# Altium PCB Amber_Main_Board.PcbDoc (part 3 of 6)
Units mm, origin at the board's own origin, x right, y up, seen from the top; angles counter-clockwise.
Board outline 90 x 23 mm, 4 copper layers (Top Layer, Power, Ground, Bottom Layer), stack 1.142 mm thick; 237 components, 104 nets, 614 pads, 347 vias.
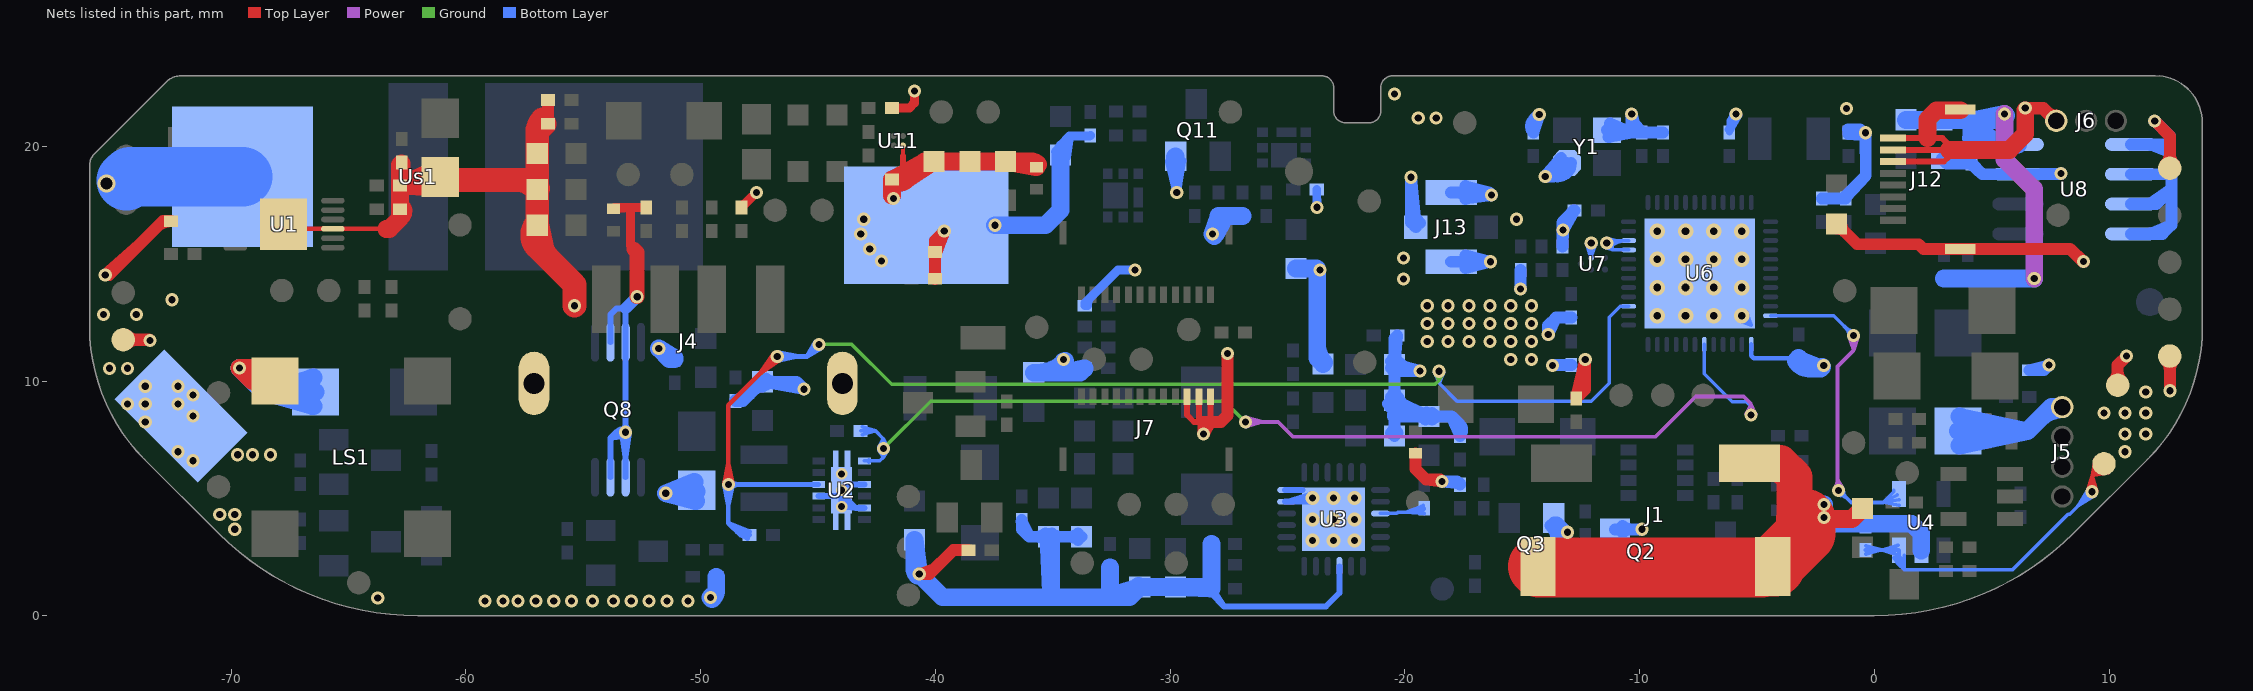
[diagram p5: the nets of this part, all layers, seen from the top]

## Via types
v1: diameter 0.559, hole 0.305, Top Layer to Bottom Layer, tented both sides, 306 vias
v2: diameter 0.66, hole 0.33, Top Layer to Bottom Layer, tented both sides, 16 vias
v3: diameter 0.762, hole 0.508, Top Layer to Bottom Layer, tented both sides, 12 vias
v4: diameter 0.6, hole 0.3, Top Layer to Bottom Layer, tented both sides, 9 vias
v5: diameter 0.5, hole 0.3, Top Layer to Bottom Layer, 3 vias
v6: diameter 0.762, hole 0.559, Top Layer to Bottom Layer, tented both sides, 1 vias

## Nets (pads, with @x,y where several pads share a name; then routed paths per layer and width w, separated by ;. In a path a pad name is that pad's centre, name@x,y a point inside that pad or via, vN(x,y) a via of type N, cw(c..) or ccw(c..) an arc to the next point about the centre after c; other vN are vias at no path point) (continued)
D-: R66.2 U3.3 | length 7.2
  Bottom Layer w0.152: U3.3@-21.041,4.359 -20.361,4.359 ; U3.3@-20.766,4.359 -20.361,4.359 ; -19.878,4.414 ccw(c-19.878,5.231) R66.2@-19.3,4.653 ; -19.51,4.414 ccw(c-19.51,4.863) R66.2@-19.192,4.545 ; R66.2@-19.237,4.693 -19.666,4.441 ; R66.2@-19.222,4.698 -19.955,4.414 ; R66.2@-19.176,4.356 -19.666,4.441 ; R66.2@-19.177,4.58 -19.343,4.414 -20.306,4.414 -20.361,4.359 ; R66.2@-19.17,4.356 -19.955,4.414 ; -19.955,4.414 -19.177,4.53 -19.666,4.441
DC/DC_CTRL: R7.1 U2.4 U6.27 | length 93.5
  Top Layer w0.203: v1@-48.999,5.606 -48.822,6.477 v1@-48.645,5.606 ; v1@-48.995,5.63 -48.837,5.906 ; v1@-48.99,5.645 -48.807,5.906 ; v1@-48.948,5.714 ccw(c-49.251,6.017) -48.822,6.017 ccw(c-48.393,6.017) v1@-48.696,5.714 ; v1@-48.654,5.645 -48.837,5.906 ; v1@-48.649,5.63 -48.807,5.906 ; v1@-46.914,11.049 cw(c-47.343,11.049) -47.04,10.745 cw(c-46.736,10.442) v1@-46.736,10.871 ; v1@-46.872,11.163 -47.446,10.339 ; v1@-46.622,10.913 -47.446,10.339 ; -48.837,5.906 v1(-48.822,5.588) ; v1(-48.822,5.588) -48.807,5.906 ; v1(-48.822,5.588) -48.822,8.963 v1(-46.736,11.049) -47.446,10.339
  Ground w0.152: v1(-44.958,11.557) -43.561,11.557 -41.859,9.855 -18.72,9.855 -18.542,10.033 ; v1@-18.738,10.36 -18.542,10.033 ; v1@-18.655,10.245 cw(c-18.798,10.033) -18.542,10.033 ; v1@-18.429,10.245 ccw(c-18.286,10.033) -18.542,10.033 ; v1@-18.346,10.36 -18.542,10.033 ; -18.542,10.033 v1(-18.542,10.414) -18.542,10.033
  Bottom Layer w0.152: v1@-18.741,10.373 -18.542,9.906 ; v1@-18.74,10.366 -18.559,10.05 ; v1@-18.734,10.348 -18.525,10.05 ; v1@-18.686,10.27 cw(c-19.033,9.923) -18.542,9.923 cw(c-18.051,9.923) v1@-18.398,10.27 ; v1@-18.35,10.348 -18.559,10.05 ; v1@-18.344,10.366 -18.525,10.05 ; v1@-18.343,10.373 -18.542,9.906 ; U6.27@-10.472,13.183 -10.834,13.183 ; -18.559,10.05 v1(-18.542,10.414) ; -18.542,9.906 v1(-18.542,10.414) ; -18.542,9.906 -17.78,9.144 -12.065,9.144 -11.303,9.906 -11.303,12.713 -10.834,13.183 ; v1(-18.542,10.414) -18.525,10.05 ; -10.834,13.183 -10.697,13.183 -10.834,13.183
  Bottom Layer w0.203: v1@-48.999,5.57 -48.822,4.699 v1@-48.645,5.57 ; v1@-48.995,5.546 -48.837,5.27 ; v1@-48.99,5.531 -48.807,5.27 ; v1@-48.948,5.462 cw(c-49.251,5.159) -48.822,5.159 cw(c-48.393,5.159) -48.696,5.462 cw(c-48.372,5.138) -48.372,5.597 ; -48.807,3.935 ccw(c-47.975,4.767) R7.1@-47.975,3.59 ; v1@-48.783,5.761 -48.517,5.61 ; v1@-48.778,5.416 -48.491,5.581 ; v1@-48.771,5.758 -48.491,5.581 ; v1@-48.758,5.422 -48.517,5.61 ; v1@-48.696,5.714 ccw(c-48.414,5.996) -48.414,5.597 ; v1@-48.654,5.531 -48.837,5.27 ; v1@-48.649,5.546 -48.807,5.27 ; -48.46,3.588 ccw(c-47.975,4.073) R7.1@-47.975,3.387 ; R7.1@-48.084,3.341 ccw(c-48.314,3.129) -48.314,3.442 ; R7.1@-48.084,3.542 cw(c-48.314,3.755) -48.314,3.442 ; R7.1@-48.061,3.32 -48.819,3.947 ; R7.1@-48.058,3.319 -48.563,3.748 ; R7.1@-48.022,3.301 -48.318,3.479 ; R7.1@-47.991,3.589 -48.318,3.479 ; R7.1@-47.925,3.442 -48.314,3.442 ; R7.1@-47.922,3.58 -48.563,3.748 ; R7.1@-47.909,3.574 -48.819,3.947 ; v1@-46.718,10.872 -45.847,11.049 v1@-46.718,11.226 ; v1@-46.694,10.876 -46.418,11.034 ; v1@-46.694,11.222 -46.418,11.064 ; v1@-46.679,10.881 -46.418,11.064 ; v1@-46.679,11.217 -46.418,11.034 ; v1@-46.61,10.923 cw(c-46.307,10.62) -46.307,11.049 cw(c-46.307,11.478) v1@-46.61,11.175 ; -45.856,5.597 U2.4@-45.096,5.597 ; v1@-45.136,11.557 cw(c-45.565,11.557) -45.262,11.253 cw(c-44.958,10.95) v1@-44.958,11.379 ; v1@-45.098,11.666 -45.466,11.049 ; U2.4@-44.971,5.597 -48.813,5.597 v1(-48.822,5.588) ; v1@-44.849,11.417 -45.466,11.049 ; -48.837,5.27 v1(-48.822,5.588) ; v1(-48.822,5.588) -48.807,5.27 ; v1(-48.822,5.588) -48.491,5.581 ; v1(-48.822,5.588) -48.517,5.61 ; v1(-48.822,5.588) -48.822,3.95 -48.314,3.442 ; -48.819,3.947 R7.1@-47.975,3.442 ; -48.563,3.748 R7.1@-47.975,3.442 ; -48.318,3.479 R7.1@-47.975,3.442 ; -48.314,3.442 -48.008,3.297 -48.314,3.442 ; -48.314,3.442 -48.008,3.587 -48.314,3.442 ; -48.314,3.442 R7.1@-47.975,3.442 ; -48.314,3.442 R7.1@-47.975,3.442 ; v1(-46.736,11.049) -46.418,11.034 ; v1(-46.736,11.049) -46.418,11.064 ; v1(-46.736,11.049) -45.466,11.049 ; -45.466,11.049 v1(-44.958,11.557) -45.466,11.049
DC/DC_PG: R6.1 U2.7 U6.18 | length 66.4
  Power w0.152: v1@-26.769,8.054 -26.06,8.255 v1@-26.769,8.456 ; v1@-26.749,8.057 -26.433,8.238 ; v1@-26.749,8.453 -26.433,8.272 ; v1@-26.731,8.063 -26.433,8.272 ; v1@-26.731,8.447 -26.433,8.238 ; v1@-26.653,8.111 cw(c-26.306,7.764) -26.306,8.255 cw(c-26.306,8.746) v1@-26.653,8.399 ; v1@-5.46,8.597 -5.261,9.03 ; v1@-5.458,8.603 -5.279,8.902 ; v1@-5.452,8.623 -5.243,8.902 ; v1@-5.402,8.7 ccw(c-5.717,9.03) -5.261,9.03 ; v1@-5.12,8.7 cw(c-4.805,9.03) -5.261,9.03 ; v1@-5.07,8.623 -5.279,8.902 ; v1@-5.064,8.603 -5.243,8.902 ; v1@-5.063,8.597 -5.261,9.03 ; v1(-26.797,8.255) -26.433,8.238 ; v1(-26.797,8.255) -26.433,8.272 ; v1(-26.797,8.255) -25.4,8.255 -24.778,7.633 -9.322,7.633 -7.696,9.259 -7.696,9.262 -7.617,9.341 -5.572,9.341 -5.261,9.03 ; -5.279,8.902 v1(-5.261,8.554) ; v1(-5.261,8.554) -5.243,8.902 ; v1(-5.261,8.554) -5.261,9.03
  Ground w0.152: v1(-42.218,7.125) -40.199,9.144 -27.686,9.144 v1(-26.797,8.255)
  Bottom Layer w0.152: R6.1@-43.188,7.874 -42.545,7.874 ; R6.1@-43.113,7.702 -42.545,7.874 ; R6.1@-43.113,8.046 -42.545,7.874 ; R6.1@-43.097,7.705 -42.827,7.86 ; R6.1@-43.097,8.043 -42.827,7.888 ; R6.1@-43.082,7.71 -42.827,7.888 ; R6.1@-43.082,8.038 -42.827,7.86 ; U2.7@-43.021,6.597 -42.365,6.597 ; R6.1@-43.015,7.751 cw(c-42.718,7.454) -42.718,7.874 cw(c-42.718,8.294) R6.1@-43.015,7.997 ; U2.7@-42.896,6.597 -42.365,6.597 ; U2.7@-42.844,6.545 cw(c-42.718,6.419) -42.718,6.597 cw(c-42.718,6.775) U2.7@-42.844,6.649 ; v1@-42.415,7.174 -42.218,7.547 ; v1@-42.414,7.071 -42.218,6.744 ; v1@-42.414,7.178 -42.241,7.424 ; v1@-42.403,7.208 -42.195,7.424 ; v1@-42.345,7.284 ccw(c-42.555,7.547) -42.218,7.547 ; v1@-42.331,6.956 cw(c-42.474,6.744) -42.218,6.744 ; v1@-42.105,6.956 ccw(c-41.962,6.744) -42.218,6.744 ; v1@-42.091,7.284 cw(c-41.881,7.547) -42.218,7.547 ; v1@-42.033,7.208 -42.241,7.424 ; v1@-42.022,7.071 -42.218,6.744 ; v1@-42.022,7.178 -42.195,7.424 ; v1@-42.021,7.174 -42.218,7.547 ; -7.247,10.776 U6.18@-7.247,11.333 ; U6.18@-7.247,11.558 -7.247,10.309 -6.061,9.123 -5.449,9.123 -5.261,8.935 ; v1@-5.457,8.608 -5.261,8.935 ; v1@-5.374,8.722 ccw(c-5.517,8.935) -5.261,8.935 ; v1(-5.261,8.554) -5.261,8.935 ; v1@-5.148,8.722 cw(c-5.005,8.935) -5.261,8.935 ; v1@-5.065,8.608 -5.261,8.935 ; R6.1@-43.138,7.874 -42.545,7.874 ; R6.1@-43.138,7.874 -42.827,7.86 ; R6.1@-43.138,7.874 -42.827,7.888 ; -42.545,7.874 -42.218,7.547 ; -42.365,6.597 -42.218,6.744 ; -42.241,7.424 v1(-42.218,7.125) ; -42.218,6.744 v1(-42.218,7.125) ; v1(-42.218,7.125) -42.195,7.424 ; v1(-42.218,7.125) -42.218,7.547
DOG_E\N\: R28.1 TP12.1 U4.3 | length 71.7
  Top Layer w0.152: v1@9.07,5.313 9.271,5.969 ; v1@9.073,5.331 9.254,5.647 ; v1@9.079,5.349 9.288,5.647 ; v1@9.127,5.427 ccw(c8.78,5.774) 9.271,5.774 ccw(c9.762,5.774) v1@9.415,5.427 ; TP12.1@9.372,6.36 cw(c8.99,6.25) 9.271,5.969 ; v1@9.463,5.349 9.254,5.647 ; v1@9.469,5.331 9.288,5.647 ; v1@9.472,5.313 9.271,5.969 ; TP12.1@9.662,6.07 ccw(c9.552,5.688) 9.271,5.969 ; 9.254,5.647 v1(9.271,5.283) ; v1(9.271,5.283) 9.288,5.647 ; v1(9.271,5.283) 9.271,5.969 ; 9.271,5.969 TP12.1@9.977,6.102 ; 9.271,5.969 TP12.1@9.404,6.675 ; 9.271,5.969 TP12.1@9.931,6.252 ; 9.271,5.969 TP12.1@9.554,6.629 ; 9.271,5.969 TP12.1@9.856,6.386 ; 9.271,5.969 TP12.1@9.688,6.554 ; 9.271,5.969 TP12.1@9.779,6.477 ; 9.271,5.969 TP12.1@9.977,6.102 ; 9.271,5.969 TP12.1@9.404,6.675 ; 9.271,5.969 TP12.1@9.931,6.252 ; 9.271,5.969 TP12.1@9.554,6.629 ; 9.271,5.969 TP12.1@9.856,6.386 ; 9.271,5.969 TP12.1@9.688,6.554 ; 9.271,5.969 TP12.1@9.779,6.477 ; 9.271,5.969 TP12.1@9.977,6.102 ; 9.271,5.969 TP12.1@9.404,6.675 ; 9.271,5.969 TP12.1@9.931,6.252 ; 9.271,5.969 TP12.1@9.554,6.629 ; 9.271,5.969 TP12.1@9.856,6.386 ; 9.271,5.969 TP12.1@9.688,6.554 ; 9.271,5.969 TP12.1@9.779,6.477 ; 9.271,5.969 TP12.1@9.779,6.477 ; 9.279,5.977 TP12.1@9.975,6.101 ; 9.279,5.977 9.403,6.673 9.279,5.977 ; 9.279,5.977 TP12.1@9.93,6.252 ; 9.279,5.977 TP12.1@9.554,6.629 ; 9.279,5.977 TP12.1@9.856,6.386 ; 9.279,5.977 TP12.1@9.688,6.554 ; 9.279,5.977 TP12.1@9.779,6.477 ; 9.279,5.977 TP12.1@9.975,6.101 ; 9.279,5.977 TP12.1@9.93,6.252 ; 9.279,5.977 TP12.1@9.554,6.629 ; 9.279,5.977 TP12.1@9.856,6.386 ; 9.279,5.977 TP12.1@9.688,6.554 ; 9.279,5.977 TP12.1@9.779,6.477 ; 9.279,5.977 TP12.1@9.975,6.101 ; 9.279,5.977 9.403,6.673 9.279,5.977 ; 9.279,5.977 TP12.1@9.931,6.252 ; 9.279,5.977 TP12.1@9.554,6.628 ; 9.279,5.977 TP12.1@9.856,6.386 ; 9.279,5.977 9.688,6.554 9.279,5.977 ; 9.279,5.977 TP12.1@9.779,6.477 ; 9.279,5.977 TP12.1@9.975,6.101 ; 9.279,5.977 TP12.1@9.931,6.252 ; 9.279,5.977 TP12.1@9.554,6.628 ; 9.279,5.977 TP12.1@9.856,6.386 ; 9.279,5.977 TP12.1@9.779,6.477
  Bottom Layer w0.152: R28.1@-0.36,2.63 0.326,2.802 R28.1@-0.36,2.974 ; R28.1@-0.34,2.633 -0.07,2.788 ; R28.1@-0.34,2.971 -0.07,2.816 ; R28.1@-0.325,2.638 -0.07,2.816 ; R28.1@-0.325,2.966 -0.07,2.788 ; R28.1@-0.258,2.679 cw(c0.039,2.382) 0.039,2.802 cw(c0.039,3.222) R28.1@-0.258,2.925 ; 0.472,2.802 cw(c0.472,2.213) U4.3@0.888,2.629 ; 0.541,2.802 ccw(c0.541,3.293) U4.3@0.888,2.946 ; U4.3@0.855,2.421 1.267,1.958 ; U4.3@0.948,2.337 cw(c0.871,2.179) 1.047,2.179 ; U4.3@0.963,2.58 0.668,2.819 ; U4.3@0.981,2.584 ccw(c1.216,2.418) 1.012,2.214 ; U4.3@0.984,3.003 0.624,2.782 ; U4.3@0.99,2.571 0.624,2.782 ; U4.3@0.998,3.006 0.668,2.819 ; U4.3@1.009,2.567 0.289,2.802 ; U4.3@1.018,3.01 0.289,2.802 ; U4.3@1.105,2.496 ccw(c1.365,2.312) 1.14,2.086 ; U4.3@1.145,2.337 ccw(c1.222,2.179) 1.047,2.179 ; U4.3@1.229,2.408 ccw(c1.515,2.206) 1.267,1.958 ; U4.3@1.267,2.578 1.267,1.958 ; v1@9.068,5.283 cw(c8.577,5.283) 8.924,4.936 cw(c9.271,4.589) v1@9.271,5.08 ; v1@9.111,5.409 8.668,4.68 ; v1@9.397,5.123 8.668,4.68 ; R28.1@-0.381,2.802 -0.07,2.788 ; R28.1@-0.381,2.802 -0.07,2.816 ; R28.1@-0.381,2.802 1.032,2.802 U4.3@1.047,2.788 ; 0.289,2.802 U4.3@1.047,2.788 ; 0.624,2.782 U4.3@1.047,2.788 ; 0.668,2.819 U4.3@1.047,2.788 ; 1.047,2.179 1.259,2.468 1.047,2.179 ; 1.047,2.179 0.834,2.468 1.047,2.179 ; 1.047,2.179 U4.3@1.047,2.538 ; 1.047,2.179 U4.3@1.047,2.538 ; 1.047,2.179 U4.3@1.047,2.788 ; 1.047,2.179 1.267,1.958 ; U4.3@1.047,2.538 1.267,1.958 ; 1.267,1.958 5.881,1.958 8.249,4.326 8.313,4.326 v1(9.271,5.283) 8.668,4.68
DOG_WDI: U4.4 U6.11 | length 25.6
  Power w0.152: v1@-1.725,5.363 -1.586,5.62 ; v1@-1.724,5.368 -1.552,5.775 ; v1@-1.668,5.478 ccw(c-1.892,5.702) -1.575,5.702 ; -1.575,5.947 ccw(c-0.911,5.947) v1@-1.38,5.478 ; v1@-1.353,5.443 -1.586,5.62 ; v1@-1.33,5.393 -1.552,5.775 ; v1@-1.09,11.905 -0.889,11.303 ; v1@-1.087,11.89 -0.906,11.574 ; v1@-1.081,11.872 -0.872,11.574 ; v1@-1.033,11.794 cw(c-1.38,11.447) -0.889,11.447 cw(c-0.398,11.447) v1@-0.745,11.794 ; v1@-0.697,11.872 -0.906,11.574 ; v1@-0.691,11.89 -0.872,11.574 ; v1@-0.688,11.905 -0.889,11.303 ; -1.586,5.62 v1(-1.524,5.334) ; -1.552,5.775 v1(-1.524,5.334) ; v1(-1.524,5.334) -1.575,5.385 -1.575,10.617 -0.889,11.303 ; -0.906,11.574 v1(-0.889,11.938) ; -0.889,11.303 v1(-0.889,11.938) ; -0.889,11.303 v1(-0.889,11.938) ; v1(-0.889,11.938) -0.872,11.574
  Bottom Layer w0.152: U6.11@-4.422,12.783 -1.734,12.783 v1(-0.889,11.938) ; U6.11@-4.197,12.783 -3.64,12.783 ; v1@-1.524,5.131 cw(c-1.524,4.572) -1.129,4.967 ; v1(-1.524,5.334) -1.496,5.334 -0.988,4.826 0.37,4.826 ; v1@-1.321,5.334 ccw(c-0.898,5.334) -1.197,5.035 ; v1@-1.092,11.938 ccw(c-1.583,11.938) -1.236,12.285 ccw(c-0.889,12.632) v1@-0.889,12.141 ; U4.4@0.828,5.336 0.828,5.284 0.37,4.826 ; U4.4@0.975,5.15 0.37,4.826 ; U4.4@1.047,4.714 0.37,4.826 ; U4.4@1.047,4.938 0.37,4.826
EEPROM_VCC: C44.1 C45.1 R43.1 R46.2 R47.2 U8.8 | length 33.4
  Power w0.762: v1(5.534,21.381) 5.534,19.444 6.806,18.172 v1(6.806,14.362)
  Bottom Layer w0.762: R43.1@1.343,21.127 C44.1@2.87,21.127 4.278,21.127 ; C45.1@4.111,20.344 cw(c4.305,19.39) 4.994,20.079 ; C45.1@4.137,20.266 4.137,20.936 ; 4.241,14.362 v1(6.806,14.362) R47.2@3.98,14.362 ; C45.1@4.256,20.261 ccw(c3.715,20.514) 4.137,20.936 ; 4.614,20.314 C45.1@4.137,20.316 ; 4.962,20.111 ccw(c5.295,20.443) U8.8@5.295,19.973 ; 5.166,21.127 ccw(c5.166,21.749) v1@5.606,21.309 ; 5.28,21.127 4.278,21.127 ; v1(5.534,21.381) 4.278,21.127 ; U8.8@6.12,20.079 4.994,20.079 ; R47.2@3.98,14.362 R46.2@2.964,14.362 R47.2@3.98,14.362 ; C45.1@4.137,20.316 4.137,20.986 ; C45.1@4.137,20.316 4.137,20.936 ; C45.1@4.137,20.316 4.137,20.936 ; C45.1@4.137,20.316 4.137,20.936 ; 4.137,20.936 U8.8@5.295,20.079 ; 4.137,20.936 4.137,20.986 ; 4.137,20.936 4.994,20.079 ; 4.137,20.986 4.278,21.127 ; 4.994,20.079 4.137,20.216 U8.8@5.295,20.079 ; 4.994,20.079 U8.8@5.295,20.079 ; 4.994,20.079 U8.8@5.295,20.079 ; 4.994,20.079 U8.8@5.295,20.079
GND: C1.2 C2.2 C3.2 C4.2 C5.2 C6.2 C7.2 C8.2 C9.2 C10.2 C11.2 C13.2 C14.2 C15.2 C16.2 C19.2 C20.2 C21.2 C22.2 C23.2 C24.2 C26.1 C27.2 C28.2 C29.1 C31.1 C32.1 C33.2 C34.1 C35.1 C36.1 C37.1 C38.1 C39.2 C40.2 C41.1 C42.1 C43.1 C44.2 C45.2 C46.2 C47.2 C48.1 C54.2 C55.2 C57.2 C58.2 C59.2 C60.2 C61.2 C62.2 C63.2 C65.2 C66.2 C67.2 C68.2 D2.1 D4.1 D12.2 D14.1 D17.2 J1.2 J1.3 J1.4 J4.5 J4.6 J5.4 J6.3 J7.10 J7.11 J7.12 J12.6 J12.7 J12.8 J12.9 J12.10 J13.2 J13.3 J13.4 J15.1 J16.2 L3.2 LS1.2 Q2.1 Q3.1 Q8.2 Q8.3 Q8.6 Q8.7 Q11.1 R4.1 R10.2 R11.2 R16.1 R22.1 R25.1 R26.2 R28.2 R39.2 R60.1 R64.1 R68.1 R69.1 R71.2 R73.2 RTH1.2 TP17.1 TP20.1 TP21.1 TP22.1 U1.3 U1.13 U2.3 U2.9 U2.11 U2.13 U2.14 U2.15 U2.16 U2.17 U3.9 U3.17 U3.18 U3.25 U4.2 U6.13 U6.33 U6.34 U6.49 U7.4 U8.1 U8.2 U8.3 U8.4 U8.7 U11.B1 Us1.3 Y1.2 Y1.4 | length 715.3
  Top Layer w0.178: -41.383,19.577 U11.B1@-41.383,20.038
  Top Layer w0.203: U1.13@-67.77,16.682 -67.57,16.482 U1.3@-65.67,16.482 -63.395,16.482
  Top Layer w0.254: -41.383,19.577 -41.383,18.74 -41.23,18.587 ; J7.10@-29.28,9.125 -29.28,8.552 ; J7.10@-29.28,9.325 -29.28,8.552 ; J7.11@-28.78,9.125 -28.78,8.255 ; J7.11@-28.78,9.325 -28.78,8.255 ; -28.575,8.255 -28.78,8.255 ; J7.12@-28.28,9.125 -28.28,8.255 J7.12@-28.28,9.325 ; J12.6@0.795,19.348 2.965,19.348 3.175,19.558 3.175,19.848 3.175,20.066 2.893,20.348 2.253,20.348 J12.8@0.795,20.348 ; J12.7@0.795,19.848 3.139,19.848 ; J12.6@1.195,19.348 2.107,19.348 ; J12.7@1.195,19.848 2.107,19.848 ; J12.8@1.195,20.348 2.107,20.348 ; 2.253,21.141 2.253,21.176 2.645,21.568 ; J12.10@3.225,21.568 2.645,21.568 ; J12.10@3.665,21.568 2.645,21.568 ; -29.28,8.552 -28.983,8.255 -28.78,8.255
  Top Layer w0.381: D4.1@-53.671,17.333 -52.994,17.391 ; D4.1@-53.663,17.391 -52.994,17.391 ; D4.1@-53.647,17.309 cw(c-53.448,17.11) D4.1@-53.448,17.391 ; -52.833,15.614 -52.994,15.774 -52.994,17.391 ; R11.2@-48.26,17.488 R11.2@-48.26,17.391 ; C48.1@-41.845,21.635 -41.103,21.635 ; C48.1@-41.795,21.635 -41.103,21.635 ; -52.994,17.391 R10.2@-52.324,17.391 -52.994,17.391 ; R11.2@-48.26,17.391 v1(-47.625,18.026) ; R11.2@-48.26,17.391 v1(-47.625,18.026) ; v1(-47.625,18.026) -48.26,17.441 v1(-47.625,18.026) ; -41.103,21.635 -40.894,21.844 ; -40.894,21.844 v1(-40.894,22.352) -40.894,21.844
  Top Layer w0.508: v1(-75.365,14.523) -73.918,15.8 ; v1@-75.365,14.548 ccw(c-75.365,15.021) -75.031,14.687 ; v1@-75.195,14.523 -72.909,16.809 ; TP22.1@-74.429,11.587 cw(c-74.009,11.167) -74.009,11.761 cw(c-74.009,12.355) TP22.1@-74.429,11.935 ; v1@-73.492,11.761 TP22.1@-74.603,11.761 v1(-73.46,11.729) ; -73.111,16.606 cw(c-72.613,16.109) R4.1@-72.613,16.813 ; -72.965,16.718 R4.1@-72.613,16.809 ; R4.1@-72.563,16.809 -72.909,16.809 ; U1.13@-67.77,16.682 U1.13@-67.618,16.834 ; C8.2@-56.499,20.955 C57.2@-56.499,21.971 ; v1@-40.69,1.803 ccw(c-40.69,2.912) -39.906,2.128 ; v1@-40.687,1.781 -40.253,1.781 ; -40.136,1.952 v1(-40.69,1.778) ; C59.2@-39.967,15.494 cw(c-38.793,15.552) v1(-39.624,16.383) ; -39.928,15.856 v1(-39.624,16.383) ; R69.1@-38.65,2.794 -39.24,2.794 ; R69.1@-38.6,2.794 -39.24,2.794 ; -28.575,8.21 v1(-28.575,7.747) ; -27.559,9.373 v1(-27.559,11.176) -27.559,8.535 -27.839,8.255 -28.28,8.255 ; C67.2@-12.7,9.263 -12.319,9.644 ; C67.2@-12.697,9.31 ccw(c-13.61,10.223) -12.319,10.223 ; -12.363,9.889 C67.2@-12.7,9.313 ; C54.2@-1.608,16.499 cw(c-1.608,16.026) -1.273,16.361 cw(c-0.939,16.695) C54.2@-1.412,16.695 ; C54.2@-1.608,16.695 -0.737,15.824 1.889,15.824 2.092,15.621 ; J12.9@3.225,15.628 2.092,15.621 ; J12.9@4.105,15.628 5.839,15.628 ; v1@6.423,21.603 7.167,21.603 ; 7.268,21.501 ccw(c7.747,21.98) 7.747,21.303 cw(c7.747,21.837) 7.37,21.459 cw(c6.992,21.082) J6.3@7.526,21.082 ; J6.3@7.39,21.38 7.167,21.603 ; v1@8.9,15.063 8.335,15.628 ; v1(8.9,15.095) 8.335,15.628 ; TP17.1@10.186,9.998 ccw(c9.766,10.418) 10.36,10.418 ccw(c10.954,10.418) TP17.1@10.534,9.998 ; TP17.1@10.36,9.824 10.36,10.681 ; v1(11.938,21.082) 12.584,20.436 TP20.1@12.584,19.063 ; TP21.1@12.41,10.889 cw(c11.99,10.469) 12.584,10.469 cw(c13.178,10.469) TP21.1@12.758,10.889 ; TP20.1@12.41,19.237 ccw(c11.99,19.657) 12.584,19.657 ccw(c13.178,19.657) TP20.1@12.758,19.237 ; -72.909,16.809 R4.1@-72.613,16.809 ; -72.909,16.809 R4.1@-72.613,16.809 ; v1(-40.69,1.778) -40.253,1.781 ; v1(-40.69,1.778) -40.253,1.781 ; -40.253,1.781 -39.24,2.794 ; C59.2@-40.013,15.494 C4.2@-40.013,14.351 C59.2@-40.013,15.494 ; C59.2@-40.013,15.494 -40.013,15.994 ; C59.2@-40.013,15.494 -40.013,15.994 ; -40.013,15.994 v1(-39.624,16.383) ; -40.013,15.994 v1(-39.624,16.383) ; C59.2@-39.963,15.494 v1(-39.624,16.383) ; C59.2@-39.963,15.494 -39.839,16.089 v1(-39.624,16.383) ; C59.2@-39.963,15.494 v1(-39.624,16.383) ; C59.2@-39.963,15.494 v1(-39.624,16.383) ; v1(-28.575,7.747) -28.28,8.255 ; v1(-28.575,7.747) -28.575,8.255 -28.28,8.255 ; -19.558,6.256 D2.1@-19.558,6.924 -19.558,6.256 ; -19.558,6.256 -19.098,5.796 ; -19.098,5.796 v1(-18.415,5.715) -18.496,5.796 -19.098,5.796 ; C67.2@-12.7,9.313 -12.319,9.644 ; C67.2@-12.7,9.313 -12.319,9.644 ; C67.2@-12.7,9.313 v1(-12.319,10.922) ; C67.2@-12.7,9.313 v1(-12.319,10.922) ; -12.319,9.644 v1(-12.319,10.922) ; -12.319,9.644 v1(-12.319,10.922) ; 2.092,15.621 3.658,15.621 J12.9@3.665,15.628 8.335,15.628 ; 7.167,21.603 J6.3@7.747,21.082 7.194,21.635 v1(6.423,21.635) 7.167,21.603 ; 10.36,10.681 v1(10.741,11.062) 10.36,10.681 ; v1(12.584,9.586) TP21.1@12.584,11.063 v1(12.584,9.586)
  Top Layer w0.635: -52.833,15.614 -52.705,15.486 v1(-52.705,13.589)
  Top Layer w0.762: -69.265,10.331 v1(-69.65,10.554) ; LS1.2@-68.516,10.483 cw(c-69.043,11.161) v1(-69.65,10.554) ; LS1.2@-68.458,9.465 v1(-69.65,10.554) ; LS1.2@-68.037,10.605 v1(-69.65,10.554) ; -63.394,16.483 -63.258,16.483 -62.8,16.941 ; -62.928,16.813 ccw(c-63.432,17.317) C1.2@-62.719,17.317 ; -62.815,16.96 C1.2@-62.8,17.317 ; C28.2@-62.8,19.21 C3.2@-62.8,18.333 ; C28.2@-62.738,19.262 C3.2@-62.8,18.333 ; C1.2@-62.671,17.337 cw(c-63.126,17.266) -62.8,16.941 ; C66.2@-61.81,18.598 C3.2@-62.75,18.333 ; C66.2@-61.386,18.926 cw(c-62.8,20.313) C3.2@-62.8,18.333 ; C66.2@-61.237,19.024 -62.269,18.405 ; C66.2@-61.209,19.034 C3.2@-62.8,18.333 ; C66.2@-61.081,18.214 -62.269,18.405 ; C66.2@-61.065,18.215 C3.2@-62.8,18.333 ; C55.2@-41.846,18.466 ccw(c-41.628,18.984) -41.23,18.587 ; C55.2@-41.795,18.456 ccw(c-41.795,19.503) -41.055,18.762 ; -41.271,18.596 C55.2@-41.795,18.587 ; -40.875,18.942 cw(c-40.059,18.125) C58.2@-40.059,19.28 ; -40.636,19.125 C58.2@-40.059,19.349 ; -35.934,19.349 cw(c-35.934,18.914) D14.1@-35.627,19.221 ; D14.1@-35.687,19.111 -35.925,19.349 ; -2.921,3.506 -2.301,4.125 -0.955,4.125 L3.2@-0.508,4.572 ; 2.253,20.348 2.253,21.141 2.645,21.533 J12.10@3.665,21.533 ; 3.175,19.848 5.751,19.848 6.423,20.52 v1@6.423,21.533 ; v1(-69.65,10.554) LS1.2@-68.136,9.994 -69.09,9.994 v1(-69.65,10.554) ; -62.8,16.941 C1.2@-62.8,17.317 ; -62.8,16.941 C1.2@-62.8,17.317 ; C1.2@-62.8,17.317 C3.2@-62.8,18.333 ; C3.2@-62.8,18.333 C66.2@-61.087,18.633 ; C3.2@-62.8,18.333 -61.437,18.333 C3.2@-62.75,18.333 ; C3.2@-62.75,18.333 -61.064,18.215 C3.2@-62.75,18.333 ; C3.2@-62.75,18.333 C66.2@-61.087,18.633 ; C3.2@-62.75,18.333 C66.2@-61.087,18.633 ; C3.2@-62.75,18.333 -61.212,19.033 C3.2@-62.75,18.333 ; -62.269,18.405 C66.2@-61.087,18.633 ; C55.2@-41.845,18.587 -41.845,17.91 C55.2@-41.845,18.587 ; C55.2@-41.845,18.587 -41.23,18.587 ; C55.2@-41.795,18.587 C58.2@-40.468,19.349 ; C55.2@-41.795,18.587 -41.23,18.587 ; C55.2@-41.795,18.587 -41.23,18.587 ; C55.2@-41.795,18.587 C58.2@-40.059,19.349 ; -41.23,18.587 C58.2@-40.059,19.349 ; -41.23,18.587 C58.2@-40.468,19.349 ; C58.2@-40.468,19.349 C58.2@-40.059,19.349 ; C58.2@-40.059,19.349 C5.2@-38.535,19.349 C2.2@-37.011,19.349 ; C2.2@-37.011,19.349 D14.1@-35.737,19.111 ; C2.2@-37.011,19.349 -35.925,19.349 ; -35.925,19.349 D14.1@-35.737,19.111 ; -35.925,19.349 D14.1@-35.737,19.111
  Top Layer w1.016: C66.2@-61.087,18.683 -60.966,18.562 C7.2@-57.067,18.562 ; C66.2@-60.881,18.839 ccw(c-60.209,19.511) -60.209,18.562 ; -57.786,18.562 cw(c-57.786,17.334) C7.2@-56.918,18.202 ; -57.469,18.52 C7.2@-56.959,18.161 ; C6.2@-57.018,16.637 ccw(c-54.858,16.637) -56.385,15.11 ; C6.2@-57.004,16.674 ccw(c-56.44,16.204) -56.96,15.685 ; -56.728,15.557 C6.2@-56.959,16.637 ; C8.2@-56.655,20.955 -56.959,20.65 C9.2@-56.959,19.685 C7.2@-56.959,18.161 ; v1(-55.376,13.208) -55.376,14.101 -56.959,15.684 ; -56.959,15.684 C6.2@-56.959,16.637 ; -56.959,15.684 C6.2@-56.959,16.637 ; C6.2@-56.959,16.637 C7.2@-56.959,18.161 ; -56.959,20.587 cw(c-56.181,20.587) -56.731,21.137 ccw(c-56.181,20.587) -56.959,20.587
  Top Layer w1.524: J1.2@-5.33,6.503 -4.009,6.503 -3.404,5.898 -3.404,3.988 -2.921,3.506
  Top Layer w2.54: J1.4@-14.33,2.096 -14.291,2.057 J1.3@-4.801,2.057 ; J1.3@-4.237,2.096 J1.3@-4.33,2.096 -2.921,3.506 -2.921,4.125
  Bottom Layer w0.152: v1@-12.263,15.83 -12.091,15.528 ; v1@-12.26,15.817 -12.058,15.495 ; v1@-12.209,15.731 cw(c-12.53,15.41) -12.076,15.41 ; U7.4@-12.076,15.359 cw(c-11.549,15.359) v1@-11.921,15.731 ; v1@-12.005,15.622 U7.4@-12.076,15.249 ; v1@-11.876,15.801 -12.091,15.528 ; v1@-11.868,15.824 -12.058,15.495 ; v1@-11.518,15.706 -11.152,15.583 ; v1@-11.396,16.078 -10.876,15.953 ; v1@-11.391,15.672 cw(c-11.37,15.365) -11.152,15.583 ; v1@-11.369,15.839 cw(c-11.022,15.492) -11.022,15.983 ; v1@-11.345,15.681 -11.083,15.868 ; v1@-11.337,15.683 -10.876,15.953 ; v1@-11.336,16.066 -11.083,15.868 ; v1@-11.261,15.731 cw(c-10.654,15.124) U6.34@-10.654,15.983 ; v1@-11.254,15.983 -10.697,15.983 -11.083,15.868 ; v1@-11.221,15.963 -11.152,15.583 ; v1@-11.21,15.816 ccw(c-10.986,15.748) -11.152,15.583 ; U6.33@-10.697,15.583 -11.152,15.583 ; U6.33@-10.472,15.583 -11.152,15.583 ; U6.34@-10.472,15.983 -11.357,15.983 -11.357,15.788 -11.152,15.583 ; U6.49@-5.782,12.568 U6.49@-5.247,12.383 ; U6.49@-5.712,12.705 U6.49@-5.247,12.383 ; v2(-5.647,12.783) U6.49@-5.247,12.383 ; U6.49@-5.632,12.529 cw(c-5.603,12.027) U6.49@-5.247,12.383 ; U6.49@-5.569,12.848 U6.49@-5.247,12.383 ; U6.49@-5.432,12.917 U6.49@-5.247,12.383 ; U6.49@-5.394,12.768 ccw(c-4.891,12.739) U6.49@-5.247,12.383 ; -12.091,15.528 v1(-12.065,15.875) ; U7.4@-12.076,15.249 -11.865,15.839 U7.4@-12.076,15.249 ; U7.4@-12.076,15.249 -12.266,15.845 U7.4@-12.076,15.249 ; U7.4@-12.076,15.249 v1(-12.065,15.875) ; U7.4@-12.076,15.249 v1(-12.065,15.875) ; U7.4@-12.076,15.249 -12.076,15.864 v1(-12.065,15.875) ; v1(-12.065,15.875) -12.058,15.495 ; v1(-11.405,15.875) -11.083,15.868 ; v1(-11.405,15.875) -11.152,15.583 ; v1(-11.405,15.875) -10.876,15.953
  Bottom Layer w0.203: C32.1@-6.212,20.579 C32.1@-6.212,20.777 ; U6.13@-5.247,11.558 -5.247,11.08 -5.134,10.967 C43.1@-3.237,10.967 ; -3.607,10.967 ccw(c-3.607,11.352) C43.1@-3.334,11.08 ; -3.568,10.967 cw(c-3.568,10.636) C43.1@-3.334,10.87 ; C43.1@-3.283,11.113 -3.482,10.955 ; C43.1@-3.271,10.832 -3.507,10.98 ; C43.1@-3.266,11.118 -3.507,10.98 ; C43.1@-3.261,10.83 -3.482,10.955 ; -3.507,10.98 C43.1@-3.229,10.975 -3.482,10.955
  Bottom Layer w0.254: Q8.7@-53.846,5.901 -53.846,7.562 ; Q8.7@-53.846,6.551 -53.846,7.488 ; Q8.2@-53.846,11.651 -53.846,12.827 ; Q8.2@-53.846,12.301 -53.846,12.827 ; -53.581,7.827 cw(c-53.308,7.554) v1@-53.156,7.909 ; v1@-53.344,7.78 -53.196,7.488 ; v1@-53.271,7.949 -53.531,7.715 ; v1@-53.267,7.951 -53.846,7.562 ; v1@-53.256,7.676 ccw(c-53.467,7.183) -53.846,7.562 ; Q8.6@-53.196,5.901 v1(-53.196,7.816) ; Q8.6@-53.196,6.551 -53.196,7.488 ; -53.196,10.064 Q8.3@-53.196,11.001 ; Q8.3@-53.196,12.301 -53.196,13.098 ; v1@-53.185,7.664 -53.531,7.715 ; v1@-53.156,7.669 -53.846,7.562 ; v1@-53.088,7.708 ccw(c-52.828,7.448) -53.196,7.448 ccw(c-53.564,7.448) -53.304,7.708 ccw(c-53.564,7.448) -53.564,7.816 ccw(c-53.564,8.184) -53.304,7.923 ccw(c-53.564,8.184) -53.196,8.184 ccw(c-52.828,8.184) v1@-53.088,7.923 ; v1@-53.048,7.78 -53.196,7.488 ; U2.3@-44.971,5.097 -44.246,5.097 U2.3@-44.846,5.097 ; U2.13@-43.873,5.347 ccw(c-43.173,5.347) U2.13@-43.668,4.852 ; U2.13@-43.779,4.997 v5(-43.996,5.347) ; U2.9@-43.146,5.597 -43.746,5.597 U2.9@-43.021,5.597 ; U2.11@-43.021,4.597 -43.413,4.597 ; R71.2@-33.767,10.541 R71.2@-33.639,10.541 ; R22.1@-28.321,1.156 ccw(c-27.961,1.156) -28.216,0.901 ; R22.1@-28.24,1.156 -28.24,0.926 -27.715,0.4 ; R22.1@-28.067,1.156 ccw(c-27.094,1.156) -27.782,0.468 ; -27.937,0.669 -28.19,1.156 -27.715,0.4 ; U3.17@-25.114,4.859 U3.17@-25.041,4.859 U3.25@-23.864,4.859 ; U3.18@-25.114,5.359 -24.364,5.359 U3.18@-24.766,5.359 ; U3.17@-24.721,4.859 ccw(c-24.721,5.789) U3.25@-24.063,5.131 ; U3.25@-24.004,5.17 -24.481,4.89 ; U3.25@-24.002,5.171 U3.25@-24.256,4.983 ; U3.25@-23.978,5.178 U3.17@-25.019,4.859 ; U3.25@-23.975,4.839 U3.25@-24.256,4.983 ; U3.25@-23.879,4.859 U3.17@-24.766,4.859 ; U3.9@-22.791,1.834 -22.791,0.969 ; U3.9@-22.791,2.109 -22.791,0.969 ; C32.1@-6.267,20.716 ccw(c-6.477,20.926) -6.18,20.926 ccw(c-5.883,20.926) C32.1@-6.093,20.716 ; v1@-6.048,21.381 cw(c-6.416,21.381) -6.156,21.121 cw(c-5.896,20.86) v1@-5.896,21.228 ; v1@-6.044,21.419 C32.1@-6.18,20.579 ; v1@-6.043,21.421 C32.1@-6.18,20.629 ; v1@-5.759,21.314 C32.1@-6.18,20.629 ; v1@-5.758,21.317 C32.1@-6.18,20.579 ; -53.846,7.562 v1(-53.196,7.816) ; -53.846,7.562 -53.592,7.816 ; -53.846,12.827 -53.575,13.098 -53.196,13.098 ; -53.592,7.816 -53.225,7.666 -53.592,7.816 ; -53.592,7.816 v1(-53.196,7.816) ; -53.592,7.816 -53.225,7.965 -53.592,7.816 ; -53.592,7.816 v1(-53.196,7.816) ; -53.531,7.715 v1(-53.196,7.816) ; -53.196,6.774 -53.044,7.805 -53.196,6.774 ; -53.196,6.774 -53.348,7.805 -53.196,6.774 ; v1(-53.196,7.816) Q8.3@-53.196,11.651 -53.196,13.098 ; v5(-43.996,4.647) U2.13@-43.996,5.18 ; v5(-43.996,4.647) v5(-43.996,5.347) ; v5(-43.996,4.647) -43.413,4.597 ; U2.13@-43.996,5.18 v5(-43.996,5.347) ; U2.13@-43.996,5.18 -43.413,4.597 ; -43.413,4.597 -43.146,4.597 -43.413,4.597 ; -27.715,0.4 -23.36,0.4 -22.791,0.969 ; U3.17@-25.019,4.859 -23.931,4.836 -24.481,4.89 ; U3.17@-25.019,4.859 v4(-23.941,5.009) ; U3.17@-24.766,4.859 U3.25@-24.256,4.983 ; U3.17@-24.766,4.859 -23.928,4.837 U3.17@-24.766,4.859 ; U3.17@-24.766,4.859 -23.989,5.175 U3.17@-24.766,4.859 ; U3.17@-24.766,4.859 v4(-23.941,5.009) ; U3.17@-24.766,4.859 v4(-23.941,5.009) ; -24.481,4.89 v4(-23.941,5.009) ; U3.25@-24.256,4.983 v4(-23.941,5.009) ; C32.1@-6.18,20.579 v1(-5.896,21.381) ; C32.1@-6.18,20.579 -6.18,21.097 ; C32.1@-6.18,20.629 -6.18,21.097 ; C32.1@-6.18,20.629 v1(-5.896,21.381) ; -6.18,21.097 v1(-5.896,21.381)
  Bottom Layer w0.381: C61.2@-34.887,19.765 -34.29,20.429 ; C61.2@-34.431,19.721 cw(c-33.83,19.969) -34.29,20.429 ; C61.2@-34.423,19.546 -34.29,20.429 ; R73.2@-33.639,13.208 -33.639,13.315 -32.222,14.732 ; R73.2@-33.589,13.208 -33.46,13.469 ; R73.2@-33.53,13.208 cw(c-33.007,13.208) -33.377,13.577 ; C60.2@-33.401,20.455 -33.427,20.429 -34.29,20.429 ; Q11.1@-30.028,19.318 -29.746,18.833 ; Q11.1@-29.961,19.204 cw(c-30.546,18.619) -29.718,18.619 ; Q11.1@-29.794,19.549 -29.718,19.472 v1(-29.718,18.034) ; -29.718,18.88 cw(c-29.259,18.88) Q11.1@-29.583,19.204 ; Q11.1@-29.51,19.341 -29.746,18.833 ; Q11.1@-29.506,19.377 v1(-29.718,18.034) ; v1@-23.757,17.407 C63.2@-23.757,18.161 v1(-23.749,17.399) ; -34.29,20.429 C61.2@-34.671,19.621 -34.671,20.048 -34.29,20.429 ; -32.222,14.732 v1(-31.496,14.732) -32.222,14.732 ; Q11.1@-29.772,19.393 -29.746,18.833 ; Q11.1@-29.772,19.393 v1(-29.718,18.034) ; Q11.1@-29.772,19.393 v1(-29.718,18.034) ; v1(-29.718,18.034) -30.036,19.356 v1(-29.718,18.034)
  Bottom Layer w0.508: C27.2@-48.514,9.198 ccw(c-48.514,10.095) -47.88,9.461 ; C27.2@-48.514,9.202 -48.066,9.318 ; C10.2@-47.567,9.97 cw(c-48.04,9.97) -47.706,9.635 cw(c-47.371,9.3) C10.2@-47.371,9.774 ; C10.2@-47.232,9.831 cw(c-46.898,9.496) -46.898,9.97 cw(c-46.898,10.443) C10.2@-47.232,10.108 ; -46.421,9.97 cw(c-46.421,8.824) v1@-45.611,9.634 ; -46.124,9.93 v1(-45.593,9.652) ; C16.2@-36.326,4.022 ccw(c-35.517,4.022) -36.089,3.45 ; C16.2@-36.322,4.072 -36.322,3.683 ; -36.218,3.618 C16.2@-36.322,4.022 ; C13.2@-35.318,3.227 ccw(c-35.652,2.892) -35.652,3.365 ccw(c-35.652,3.839) C13.2@-35.318,3.504 ; C13.2@-35.04,3.227 cw(c-34.706,2.892) -34.706,3.365 cw(c-34.706,3.839) C13.2@-35.04,3.504 ; C15.2@-33.921,3.227 ccw(c-34.255,2.892) -34.255,3.365 ccw(c-34.255,3.839) C15.2@-33.921,3.504 ; C15.2@-33.782,3.365 C13.2@-35.179,3.365 -36.005,3.365 ; C46.2@-20.723,9.031 ccw(c-19.822,9.51) -19.822,8.49 ; C20.2@-20.586,7.792 ccw(c-20.92,8.127) -20.447,8.127 ccw(c-19.974,8.127) C20.2@-20.308,7.792 ; C46.2@-20.586,9.316 ccw(c-20.92,9.651) -20.447,9.651 ccw(c-19.974,9.651) C46.2@-20.308,9.316 ; C47.2@-20.586,10.563 cw(c-20.92,10.229) -20.447,10.229 cw(c-19.974,10.229) C47.2@-20.308,10.563 ; C47.2@-20.586,10.84 ccw(c-20.92,11.175) -20.447,11.175 ccw(c-19.974,11.175) C47.2@-20.308,10.84 ; C26.1@-20.447,11.819 C47.2@-20.447,10.702 ; -20.363,8.645 C46.2@-20.447,9.178 ; C26.1@-20.328,11.938 C47.2@-20.447,10.702 ; C47.2@-20.304,10.836 ccw(c-19.358,11.725) v1(-19.358,10.427) ; C46.2@-20.274,9.27 ccw(c-18.977,9.959) C14.2@-18.977,8.49 ; C47.2@-20.007,10.601 v1(-19.358,10.427) ; -19.756,8.714 C46.2@-20.447,9.178 ; -19.739,17.644 ccw(c-18.445,17.644) J13.3@-19.36,16.729 ; v1@-19.739,18.618 J13.3@-19.534,16.555 ; -19.711,8.687 C14.2@-18.977,8.49 ; -19.695,17.309 J13.3@-19.534,16.555 ; J13.3@-19.567,16.885 v1(-19.739,18.682) -19.739,16.76 J13.3@-19.534,16.555 ; -19.434,8.613 ccw(c-19.312,9.07) C14.2@-19.075,8.66 ; -19.434,8.613 cw(c-19.557,8.156) C14.2@-19.147,8.392 ; C14.2@-19.116,8.352 ccw(c-19.45,8.017) -19.45,8.49 ccw(c-19.45,8.963) C14.2@-19.116,8.629 ; C14.2@-18.838,8.352 cw(c-18.504,8.017) -18.504,8.49 cw(c-18.504,8.963) C14.2@-18.838,8.629 ; J13.4@-18.034,15.08 v1(-16.356,15.08) ; -17.944,8.419 cw(c-18.656,7.707) C19.2@-17.649,7.707 ; -17.784,8.21 C19.2@-17.653,7.707 ; R25.1@-17.653,5.58 -17.788,5.715 v1(-18.415,5.715) R25.1@-17.653,5.63 ; C19.2@-17.653,7.657 -17.653,8.128 ; C19.2@-17.65,7.704 ccw(c-17.866,7.915) -17.653,8.128 ; J13.4@-17.459,15.08 v1(-16.356,15.08) ; J13.4@-17.426,14.811 v1(-16.356,15.08) ; J13.4@-17.267,14.888 cw(c-16.805,14.425) -16.805,15.08 cw(c-16.805,15.734) J13.4@-17.267,15.271 ; J13.2@-17.267,17.838 cw(c-16.805,17.375) -16.805,18.03 cw(c-16.805,18.684) J13.2@-17.267,18.221 ; -16.637,18.03 cw(c-16.637,17.593) v1@-16.328,17.902 ; C40.2@-15.07,14.685 v1(-15.07,13.918) C40.2@-15.07,14.735 ; -14.618,20.945 v1(-14.278,21.349) ; C29.1@-14.536,20.628 cw(c-13.645,20.716) v1(-14.278,21.349) ; C29.1@-14.535,20.626 cw(c-14.296,20.859) -14.532,21.095 ; C29.1@-14.532,20.674 cw(c-13.604,20.674) v1@-14.26,21.331 ; -14.51,20.947 v1(-14.278,21.349) ; -14.501,21.148 cw(c-14.173,20.958) v1@-14.271,21.324 ; -14.5,20.915 v1(-14.278,21.349) ; -14.46,21.086 C29.1@-14.532,20.629 ; v1@-14.408,21.138 C29.1@-14.532,20.629 ; v1@-14.024,18.739 ccw(c-14.024,19.665) Y1.2@-13.37,19.01 ; v1@-13.872,11.983 cw(c-12.891,11.983) -13.584,12.676 ; Q3.1@-13.802,3.836 cw(c-14.772,2.866) -13.4,2.866 ; -13.74,12.473 v1(-13.897,11.983) ; -13.733,18.792 v1(-14.024,18.714) ; v1(-13.716,10.668) C42.1@-12.911,10.676 v1@-13.708,10.676 ; -13.566,18.814 cw(c-13.146,18.394) Y1.2@-13.146,18.988 ; -13.561,18.863 v1(-14.024,18.714) ; -13.509,18.714 ccw(c-13.509,19.289) Y1.2@-12.934,19.281 ; Y1.2@-13.442,19.276 cw(c-14.208,19.255) -13.666,18.714 ; Y1.2@-13.442,19.288 cw(c-14.024,19.296) v1(-14.024,18.714) ; -13.4,2.725 cw(c-12.25,2.725) v1@-13.063,3.538 ; -13.36,3.023 v1(-13.081,3.556) ; Y1.2@-13.341,19.507 v1(-14.024,18.714) ; v1@-13.237,16.428 cw(c-12.323,16.428) C38.1@-12.969,17.074 ; v1@-13.206,16.664 C38.1@-12.826,17.267 ; -13.114,16.884 v1(-13.262,16.428) ; Y1.2@-13.022,19.015 v1(-14.024,18.714) ; C41.1@-12.911,12.703 -13.558,12.703 ; -12.733,1.496 ccw(c-12.319,1.91) R16.1@-12.319,1.324 ; -12.612,1.402 R16.1@-12.319,1.328 ; R16.1@-12.319,1.278 -12.516,1.278 -13.4,2.162 ; Y1.4@-11.396,20.684 -11.291,20.579 -10.341,20.579 ; Y1.4@-11.333,20.388 -10.341,20.579 ; Y1.4@-11.312,20.39 -10.656,20.615 ; Y1.4@-11.273,20.97 -10.341,20.579 ; Y1.4@-11.255,20.965 -10.656,20.615 ; Y1.4@-11.137,20.893 ccw(c-10.378,21.652) -10.378,20.579 ; Q2.1@-10.728,3.539 cw(c-10.381,3.192) -10.381,3.683 cw(c-10.381,4.174) Q2.1@-10.728,3.827 ; C31.1@-9.915,20.625 cw(c-9.458,21.381) v1(-10.341,21.381) ; C31.1@-9.913,20.629 -10.232,20.955 v1(-10.341,21.381) ; C36.1@-2.243,17.767 C37.1@-1.227,17.767 -1.227,17.89 -0.37,18.747 ; C37.1@-1.227,17.817 -0.37,18.747 ; C34.1@-1.102,20.532 cw(c-0.78,20.05) v1@-0.37,20.46 ; -0.76,20.706 cw(c-0.76,20.195) v1@-0.399,20.556 ; -0.37,18.77 v1(-0.381,20.574) ; C44.2@3.008,19.614 ccw(c3.849,20.455) 3.849,19.266 ; 3.541,19.307 C44.2@2.87,19.476 ; C45.2@4.137,19.216 4.594,18.809 ; U8.7@5.295,18.809 4.594,18.809 ; U8.7@6.142,18.809 v1(7.947,18.841) 6.945,18.809 7.947,18.809 U8.7@6.12,18.809 4.594,18.809 ; C33.2@6.842,10.459 ccw(c6.842,11.278) v1@7.421,10.699 ; 7.054,10.487 v1(7.439,10.681) ; v1@7.251,10.568 C33.2@6.646,10.459 ; U8.4@10.92,16.269 12.265,16.269 ; U8.3@10.92,17.539 12.011,17.539 12.646,18.174 ; U8.2@10.92,18.809 12.392,18.809 ; U8.1@10.92,20.079 12.265,20.079 ; U8.4@11.745,16.29 ccw(c11.776,17.52) 12.646,16.65 ; U8.3@11.745,17.56 ccw(c11.745,18.253) 12.235,17.763 ; U8.2@11.745,18.809 12.392,18.809 ; U8.1@11.747,20.058 cw(c11.835,18.982) 12.598,19.745 ; v1(11.938,21.082) 12.598,20.422 12.598,19.745 ; 12.091,17.653 11.745,17.539 12.646,18.174 ; 12.296,19.958 U8.1@11.745,20.079 ; 12.365,16.439 U8.4@11.745,16.269 ; -48.189,9.152 C27.2@-48.514,9.152 -48.189,9.152 ; -48.189,9.152 C10.2@-47.371,9.97 ; -48.189,9.152 C10.2@-47.371,9.97 ; C10.2@-47.371,9.97 v1(-45.593,9.652) ; C10.2@-47.371,9.97 -45.91,9.97 ; -45.91,9.97 v1(-45.593,9.652) ; -45.91,9.97 v1(-45.593,9.652) ; -36.322,3.683 C16.2@-36.322,4.022 ; -36.322,3.683 C16.2@-36.322,4.022 ; -36.322,3.683 -36.005,3.365 ; C16.2@-36.322,4.022 -36.005,3.365 ; C46.2@-20.586,9.039 cw(c-20.92,8.705) -20.447,8.705 ; C46.2@-20.586,9.039 cw(c-20.92,8.705) -20.447,8.705 ; C46.2@-20.586,9.039 cw(c-20.92,8.705) -20.447,8.705 ; C46.2@-20.586,9.039 cw(c-20.92,8.705) -20.447,8.705 ; C46.2@-20.586,9.039 cw(c-20.92,8.705) -20.447,8.705 ; -20.447,8.49 C46.2@-20.447,9.178 ; -20.447,8.49 C46.2@-20.447,9.178 ; -20.447,8.49 C46.2@-20.447,9.178 ; -20.447,8.49 C20.2@-20.447,7.654 C46.2@-20.447,9.178 ; -20.447,8.49 -20.511,8.49 C46.2@-20.447,9.178 ; -20.447,8.49 C14.2@-18.977,8.49 ; -20.447,8.705 cw(c-19.974,8.705) C46.2@-20.308,9.039 ; -20.447,8.705 cw(c-19.974,8.705) C46.2@-20.308,9.039 ; -20.447,8.705 cw(c-19.974,8.705) C46.2@-20.308,9.039 ; -20.447,8.705 cw(c-19.974,8.705) C46.2@-20.308,9.039 ; -20.447,8.705 cw(c-19.974,8.705) C46.2@-20.308,9.039 ; C46.2@-20.447,9.178 C14.2@-18.977,8.49 ; C46.2@-20.447,9.178 C14.2@-18.977,8.49 ; C46.2@-20.447,9.178 C47.2@-20.447,10.702 ; C47.2@-20.447,10.702 -19.733,10.482 v1(-19.358,10.427) ; C47.2@-20.447,10.702 v1(-19.358,10.427) ; C47.2@-20.447,10.702 v1(-19.358,10.427) ; C47.2@-20.447,10.702 v1(-19.358,10.427) ; C47.2@-20.447,10.702 -20.172,10.427 v1(-19.358,10.427) ; C14.2@-18.977,8.49 -18.015,8.49 ; -18.015,8.49 C19.2@-17.653,7.707 ; -18.015,8.49 -17.653,8.128 ; C19.2@-17.653,7.707 -17.653,8.128 ; C19.2@-17.653,7.707 -17.653,8.128 ; v1@-16.42,18.03 -17.424,18.298 v1(-16.31,17.92) ; v1@-16.42,18.03 -17.424,17.761 v1(-16.31,17.92) ; v1@-16.42,18.03 -17.459,18.03 v1(-16.31,17.92) ; v1@-16.42,18.03 J13.2@-18.034,18.03 v1(-16.31,17.92) ; v1@-16.42,18.03 v1(-16.31,17.92) ; v1(-16.356,15.08) -17.426,15.349 v1(-16.356,15.08) ; C29.1@-14.532,20.629 v1(-14.278,21.349) ; C29.1@-14.532,20.629 -14.532,21.095 ; C29.1@-14.532,20.629 -14.532,21.095 ; C29.1@-14.532,20.629 v1(-14.278,21.349) ; C29.1@-14.532,20.629 v1(-14.278,21.349) ; C29.1@-14.532,20.629 v1(-14.278,21.349) ; C29.1@-14.532,20.629 v1(-14.278,21.349) ; C29.1@-14.532,20.629 v1(-14.278,21.349) ; -14.532,21.095 C29.1@-14.532,20.579 v1(-14.278,21.349) ; -14.532,21.095 v1(-14.278,21.349) ; v1(-14.024,18.714) -13.666,18.714 ; v1(-14.024,18.714) -13.666,18.714 ; v1(-14.024,18.714) -13.666,18.714 ; v1(-14.024,18.714) -13.666,18.714 ; v1(-14.024,18.714) -13.666,18.714 ; v1(-14.024,18.714) -13.666,18.714 ; v1(-14.024,18.714) -13.666,18.714 ; v1(-14.024,18.714) Y1.2@-13.146,19.284 ; v1(-14.024,18.714) Y1.2@-13.096,19.284 -13.666,18.714 ; v1(-14.024,18.714) Y1.2@-12.97,19.046 ; v1(-14.024,18.714) Y1.2@-13.399,19.438 ; v1(-14.024,18.714) Y1.2@-13.146,19.284 ; v1(-14.024,18.714) Y1.2@-12.97,19.046 ; v1(-14.024,18.714) Y1.2@-13.399,19.438 ; v1(-14.024,18.714) Y1.2@-13.146,19.284 ; v1(-14.024,18.714) -13.005,19.023 v1@-13.784,18.771 ; v1(-14.024,18.714) -13.37,19.477 v1@-13.784,18.771 ; v1(-14.024,18.714) Y1.2@-13.146,19.284 ; v1(-14.024,18.714) -13.666,18.714 ; v1(-13.897,11.983) -13.558,12.703 ; v1(-13.897,11.983) -13.897,12.364 ; v1(-13.897,11.983) -13.897,12.364 ; -13.897,12.364 -13.558,12.703 ; v1@-13.784,18.771 Y1.2@-13.146,19.284 ; -13.666,18.714 Y1.2@-12.97,19.046 ; -13.666,18.714 Y1.2@-13.399,19.438 ; -13.666,18.714 Y1.2@-13.146,19.284 ; -13.666,18.714 Y1.2@-12.97,19.046 ; -13.666,18.714 Y1.2@-13.399,19.438 ; -13.666,18.714 Y1.2@-13.146,19.284 ; Q3.1@-13.658,3.98 -13.446,3.221 v1(-13.081,3.556) ; Q3.1@-13.658,3.98 v1(-13.081,3.556) ; Q3.1@-13.658,3.98 v1(-13.081,3.556) ; Q3.1@-13.658,3.98 -13.4,2.162 ; -13.4,2.162 v1(-13.081,3.556) ; -13.4,2.162 v1(-13.081,3.556) ; -13.4,2.162 Q3.1@-13.4,3.857 ; Q3.1@-13.4,3.857 v1(-13.081,3.556) ; Q3.1@-13.4,3.857 v1(-13.081,3.556) ; Q3.1@-13.4,3.857 -13.516,3.973 v1(-13.081,3.556) ; -13.292,16.751 -13.292,15.785 v1(-13.262,16.428) ; -13.292,16.751 C38.1@-12.826,17.267 ; -13.292,16.751 v1(-13.262,16.428) ; -13.292,16.751 v1(-13.262,16.428) ; -13.292,16.751 v1(-13.262,16.428) ; -13.292,16.751 v1(-13.262,16.428) ; -13.292,16.751 C38.1@-12.776,17.267 v1(-13.262,16.428) ; -13.292,16.751 C39.2@-13.292,15.735 v1(-13.262,16.428) ; v1(-13.262,16.428) C38.1@-12.826,17.267 ; v1(-13.262,16.428) C38.1@-12.826,17.267 ; -10.656,20.615 -11.346,20.684 -10.341,20.579 ; -10.341,20.579 C31.1@-9.913,20.579 ; -10.341,20.579 C31.1@-9.913,20.579 ; -10.341,20.579 v1(-10.341,21.381) ; C31.1@-9.913,20.579 C35.1@-9.006,20.579 C31.1@-9.913,20.579 ; v1(-9.906,3.683) -10.871,3.683 v1(-9.906,3.683) ; v1(-9.906,3.683) Q2.1@-11.049,3.683 v1(-9.906,3.683) ; C34.1@-1.1,20.629 v1@-0.616,20.706 ; C34.1@-1.1,20.629 v1@-0.616,20.706 ; C34.1@-1.1,20.629 -0.818,20.628 v1(-0.381,20.574) ; C34.1@-1.1,20.629 v1(-0.381,20.574) ; C34.1@-1.1,20.629 v1(-0.381,20.574) ; C34.1@-1.1,20.629 v1(-0.381,20.574) ; v1@-0.616,20.706 v1@-0.37,20.46 ; v1@-0.616,20.706 -1.132,20.706 v1(-0.381,20.574) ; v1(-0.381,20.574) -1.1,20.529 v1@-0.37,20.46 ; -0.37,18.747 v1@-0.37,20.46 ; C44.2@2.87,19.476 C45.2@4.137,19.266 ; C44.2@2.87,19.476 C45.2@4.137,19.266 ; C44.2@2.87,19.476 C44.2@3.079,19.266 ; C44.2@3.079,19.266 C45.2@4.137,19.266 ; C44.2@3.079,19.266 C45.2@4.137,19.266 ; C45.2@4.137,19.266 4.594,18.809 ; C33.2@6.646,10.459 7.217,10.459 ; C33.2@6.646,10.459 v1(7.439,10.681) ; C33.2@6.646,10.459 v1(7.439,10.681) ; 7.217,10.459 C33.2@6.596,10.459 v1(7.439,10.681) ; 7.217,10.459 v1(7.439,10.681) ; U8.4@11.745,16.269 12.646,16.65 ; U8.4@11.745,16.269 12.265,16.269 ; U8.4@11.745,16.269 12.265,16.269 ; U8.1@11.745,20.079 12.598,19.745 ; U8.1@11.745,20.079 12.265,20.079 ; U8.1@11.745,20.079 12.265,20.079 ; 12.265,16.269 12.646,16.65 ; 12.265,20.079 12.598,19.745 ; 12.392,18.809 12.646,19.063 ; 12.598,19.745 12.598,19.11 12.646,19.063 ; 12.646,16.65 12.646,18.174 ; 12.646,18.174 12.646,19.063 ; -53.196,13.098 v1(-52.705,13.589) -53.196,13.098
  Bottom Layer w0.762: v1(-69.65,10.554) -68.634,9.538 ; D12.2@-66.839,9.1 ccw(c-67.895,8.043) -67.895,9.538 ccw(c-67.895,11.032) D12.2@-66.839,9.975 ; D12.2@-66.601,8.952 -67.509,9.589 ; D12.2@-66.601,10.124 -67.509,9.487 ; D12.2@-66.546,8.936 -67.509,9.487 ; D12.2@-66.546,10.139 -67.509,9.589 ; D12.2@-66.487,8.925 -68.634,9.538 ; D12.2@-66.487,10.151 -68.634,9.538 ; v1@-51.366,5.22 ccw(c-51.366,6.499) C65.2@-50.461,5.594 ; R39.2@-51.108,10.977 v1(-51.787,11.392) ; -50.988,5.22 cw(c-50.988,4.475) C65.2@-50.461,5.002 ; C65.2@-50.726,5.391 v1(-51.489,5.22) ; C65.2@-50.255,5.707 v1(-51.489,5.22) ; C65.2@-50.219,5.234 -50.233,5.22 v1(-51.489,5.22) ; C65.2@-50.207,4.881 v1(-51.489,5.22) ; v1(-49.584,0.775) -49.338,1.021 ; v1@-49.512,0.703 ccw(c-49.933,1.123) -49.338,1.123 ; -40.894,2.025 ccw(c-40.443,2.025) v1@-40.762,1.706 ; v1(-37.465,16.637) -35.306,16.637 -34.671,17.272 ; C68.2@-35.814,10.351 -34.544,10.351 ; C68.2@-35.678,10.351 ccw(c-35.678,12.056) v1@-34.472,10.85 ; v1@-34.544,10.844 -34.544,10.351 ; R71.2@-33.689,10.541 -34.544,10.351 ; R71.2@-33.639,10.541 -33.83,10.351 -34.544,10.351 ; C24.2@-32.566,2.003 -32.566,0.987 ; C24.2@-32.566,2.053 -32.566,0.987 ; -32.505,0.787 ccw(c-32.505,2.428) C22.2@-31.345,1.268 ; -32.08,0.843 C22.2@-31.296,1.219 ; Q11.1@-29.794,19.549 Q11.1@-29.772,19.571 ; R22.1@-28.304,1.219 C23.2@-29.772,1.219 ; R22.1@-28.29,1.156 C23.2@-29.772,1.219 ; v1@-28.122,16.184 ccw(c-28.562,16.624) -27.94,16.624 ; v1@-28.046,16.404 ccw(c-28.618,16.976) R60.1@-27.809,16.976 ; R60.1@-27.837,16.767 v1(-28.194,16.256) ; R60.1@-27.815,17.015 cw(c-28.296,16.866) -27.94,16.51 ; R60.1@-27.81,16.736 v1(-28.194,16.256) ; C62.2@-24.638,14.795 -23.762,14.795 -23.736,14.769 -23.736,10.972 C21.2@-23.495,10.731 -23.702,11.223 ; -23.736,11.479 ccw(c-22.748,11.479) C21.2@-23.446,10.78 ; C43.1@-3.343,10.86 ccw(c-2.795,11.171) -2.795,10.541 ; C43.1@-3.322,10.832 ccw(c-2.619,11.535) -2.619,10.541 ; C43.1@-3.237,10.967 C43.1@-3.221,10.967 ; C43.1@-3.229,10.975 C43.1@-3.221,10.967 ; -3.114,10.628 C43.1@-3.229,10.925 ; -2.876,10.575 C43.1@-3.229,10.925 ; v1@-2.222,10.604 v1@-2.286,10.541 ; v1(-2.145,4.734) v1(-2.145,4.191) -1.876,3.922 1.589,3.922 1.997,3.514 U4.2@1.997,2.788 ; D17.2@3.621,7.25 6.522,7.866 ; D17.2@3.621,8.481 6.522,7.866 ; D17.2@3.701,7.264 4.664,7.815 ; D17.2@3.701,8.467 4.664,7.917 ; D17.2@3.756,7.28 4.664,7.917 ; D17.2@3.756,8.452 4.664,7.815 ; D17.2@3.994,7.428 cw(c5.05,6.371) 5.05,7.866 cw(c5.05,9.36) D17.2@3.994,8.303 ; 7.065,8.408 cw(c8.001,7.472) J5.4@8.001,8.796 ; 7.339,8.619 J5.4@8.001,8.89 7.546,8.89 6.522,7.866 ; -68.634,9.538 D12.2@-66.401,9.538 ; -67.509,9.487 D12.2@-66.401,9.538 ; -67.509,9.589 D12.2@-66.401,9.538 ; v1(-51.787,11.392) R39.2@-51.108,10.927 R39.2@-51.322,10.927 ; v1(-51.787,11.392) R39.2@-51.322,10.927 ; v1(-51.787,11.392) R39.2@-51.322,10.927 ; v1(-51.489,5.22) C65.2@-50.165,5.298 ; v1(-51.489,5.22) -50.25,4.888 -51.035,5.263 ; v1(-51.489,5.22) -51.035,5.263 ; v1(-51.489,5.22) -51.035,5.263 ; v1(-51.489,5.22) C65.2@-50.165,5.298 ; v1(-51.489,5.22) -51.035,5.263 ; v1(-51.489,5.22) -50.282,5.7 -51.035,5.263 ; -51.035,5.263 C65.2@-50.165,5.298 ; -49.338,1.021 R64.1@-49.338,1.664 -49.338,1.021 ; v1(-40.69,1.778) C11.2@-40.894,3.238 -40.894,1.982 v1(-40.69,1.778) ; v1(-40.69,1.778) -39.699,0.787 -35.306,0.787 ; -35.306,0.787 -35.077,1.016 ; -35.306,0.787 -32.766,0.787 ; -35.077,1.016 C13.2@-35.179,3.365 -35.077,3.264 -35.077,1.016 ; -34.671,17.272 C61.2@-34.671,19.621 -34.671,17.272 ; -32.766,0.787 C22.2@-31.296,1.219 ; -32.766,0.787 -31.728,0.787 C22.2@-31.296,1.219 ; -32.766,0.787 -32.566,0.987 ; C22.2@-31.296,1.219 C23.2@-29.772,1.219 ; v1(-28.194,16.256) R60.1@-27.94,16.976 ; v1(-28.194,16.256) R60.1@-27.94,16.976 ; v1(-28.194,16.256) R60.1@-27.94,16.976 ; v1(-28.194,16.256) -27.917,16.572 R60.1@-27.94,16.976 ; v1(-28.194,16.256) R60.1@-27.94,16.976 ; v1(-28.194,16.256) -27.94,16.51 ; -27.94,16.51 R60.1@-27.94,16.976 ; -27.94,16.51 R60.1@-27.94,16.976 ; -27.94,16.51 R60.1@-27.94,17.026 ; R60.1@-27.94,17.026 R68.1@-26.924,17.026 R60.1@-27.94,17.026 ; C43.1@-3.229,10.925 v1@-2.286,10.541 ; C43.1@-3.229,10.925 -2.795,10.541 ; C43.1@-3.229,10.925 -2.795,10.541 ; C43.1@-3.221,10.967 -2.795,10.541 ; -2.795,10.541 v1@-2.286,10.541 ; D17.2@3.556,7.866 4.664,7.815 ; D17.2@3.556,7.866 4.664,7.917 ; D17.2@3.556,7.866 6.522,7.866 ; R22.1@-28.24,1.156 RTH1.2@-28.24,3.061 R22.1@-28.24,1.156
  Bottom Layer w2.54: -74.461,18.542 -74.303,18.7 Us1.3@-69.515,18.7
  other v1: -59.182,0.635 -58.42,0.635 -57.785,0.635 -57.023,0.635 -56.261,0.635 -55.499,0.635 -54.61,0.635 -53.721,0.635 -52.959,0.635 -52.197,0.635 -51.435,0.635 -50.546,0.635 -63.754,0.762 -69.85,3.683 -70.485,4.318 -69.85,4.318 -71.628,6.604 -69.723,6.858 -69.088,6.858 -68.326,6.858 -72.263,6.985 10.668,6.985 10.668,7.747 11.557,7.747 -73.66,8.255 -71.628,8.509 9.779,8.636 10.668,8.636 11.557,8.636 -74.422,9.017 -73.66,9.017 -72.263,9.017 -71.628,9.398 11.557,9.525 -73.66,9.779 -72.263,9.779 -75.184,10.541 -74.422,10.541 -2.159,10.668 -34.544,10.922 -15.494,10.922 -14.605,10.922 -19.05,11.684 -18.161,11.684 -17.272,11.684 -16.383,11.684 -15.494,11.684 -14.605,11.684 -19.05,12.446 -18.161,12.446 -17.272,12.446 -16.383,12.446 -15.494,12.446 -14.605,12.446 -75.438,12.827 -74.041,12.827 -19.05,13.208 -18.161,13.208 -17.272,13.208 -16.383,13.208 -15.494,13.208 -14.605,13.208 -72.517,13.462 -20.066,14.351 -23.622,14.732 -42.291,15.113 -20.066,15.24 -42.799,15.621 -43.18,16.256 -43.053,16.891 -15.24,16.891 -41.783,17.78 -19.431,21.209 -18.669,21.209 -1.197,21.603 -20.447,22.225
  other v2: -9.247,12.783 -8.047,12.783 -6.847,12.783 -9.247,13.983 -8.047,13.983 -6.847,13.983 -5.647,13.983 -9.247,15.183 -8.047,15.183 -6.847,15.183 -5.647,15.183 -9.247,16.383 -8.047,16.383 -6.847,16.383 -5.647,16.383
  other v3: -75.311,18.415
  other v4: -23.941,3.209 -23.041,3.209 -22.141,3.209 -23.941,4.109 -23.041,4.109 -22.141,4.109 -23.041,5.009 -22.141,5.009
  other v5: -43.996,6.047